# EAGLE board mini32 (EAGLE 7.2.0)
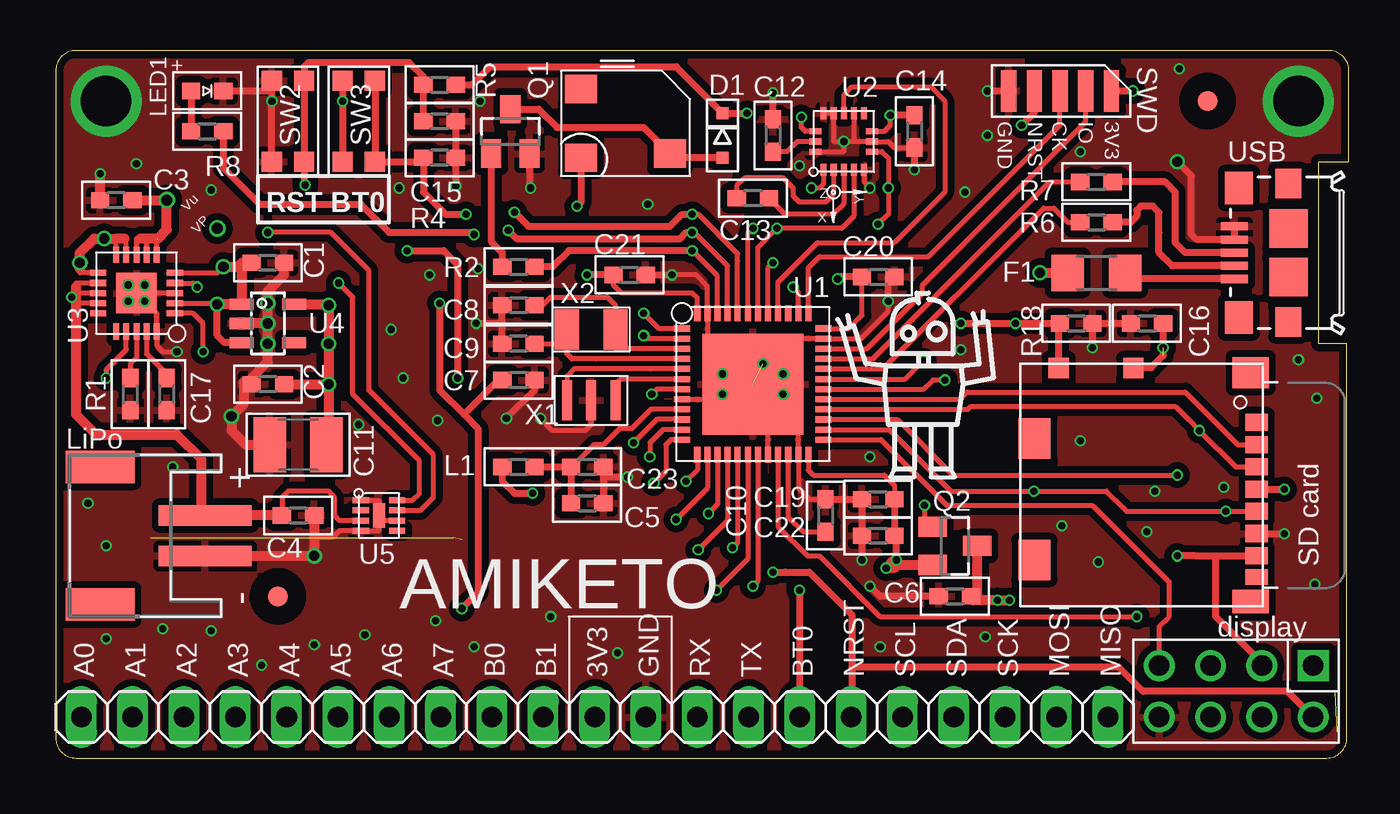
[diagram p0: board, top side]
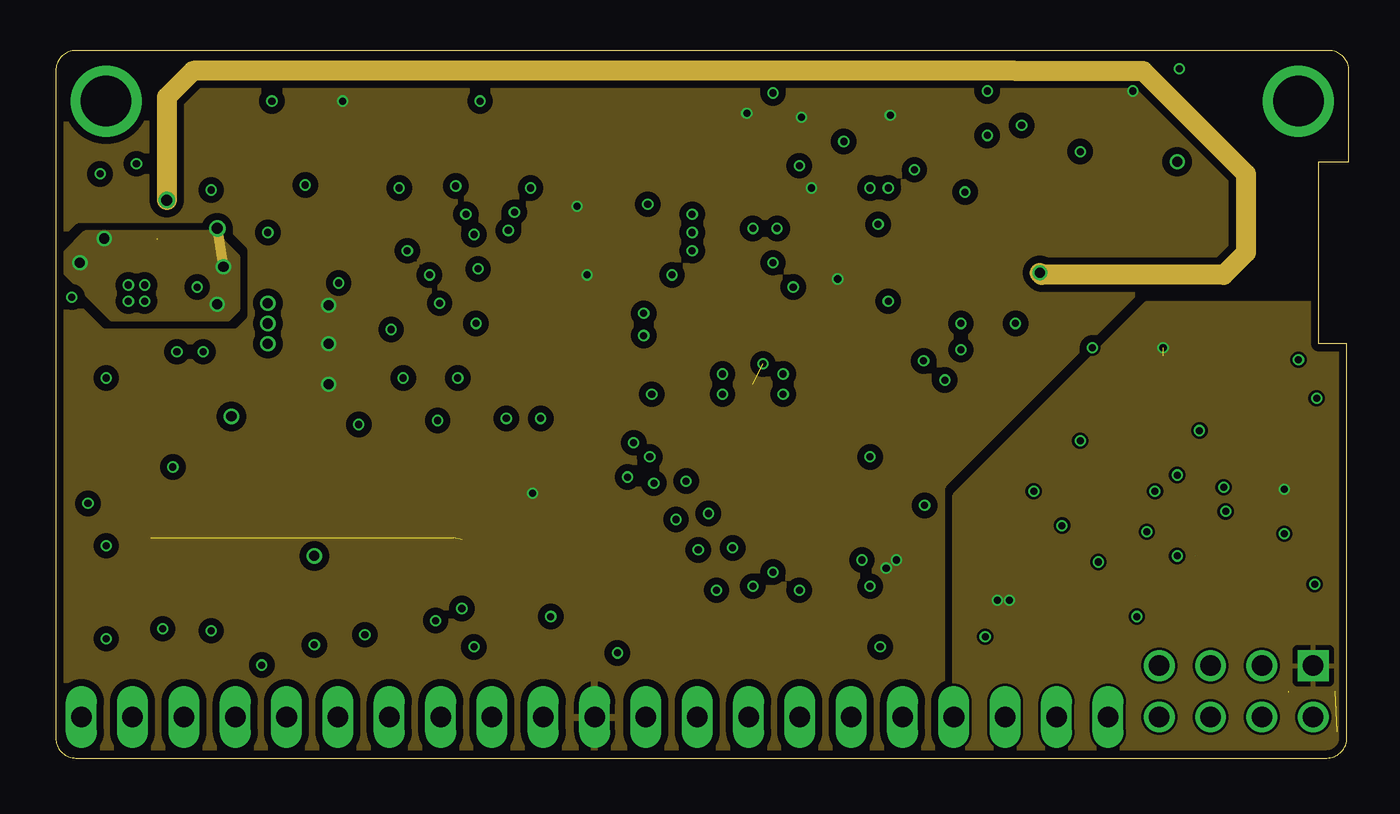
[diagram p1: board, inner layer V]
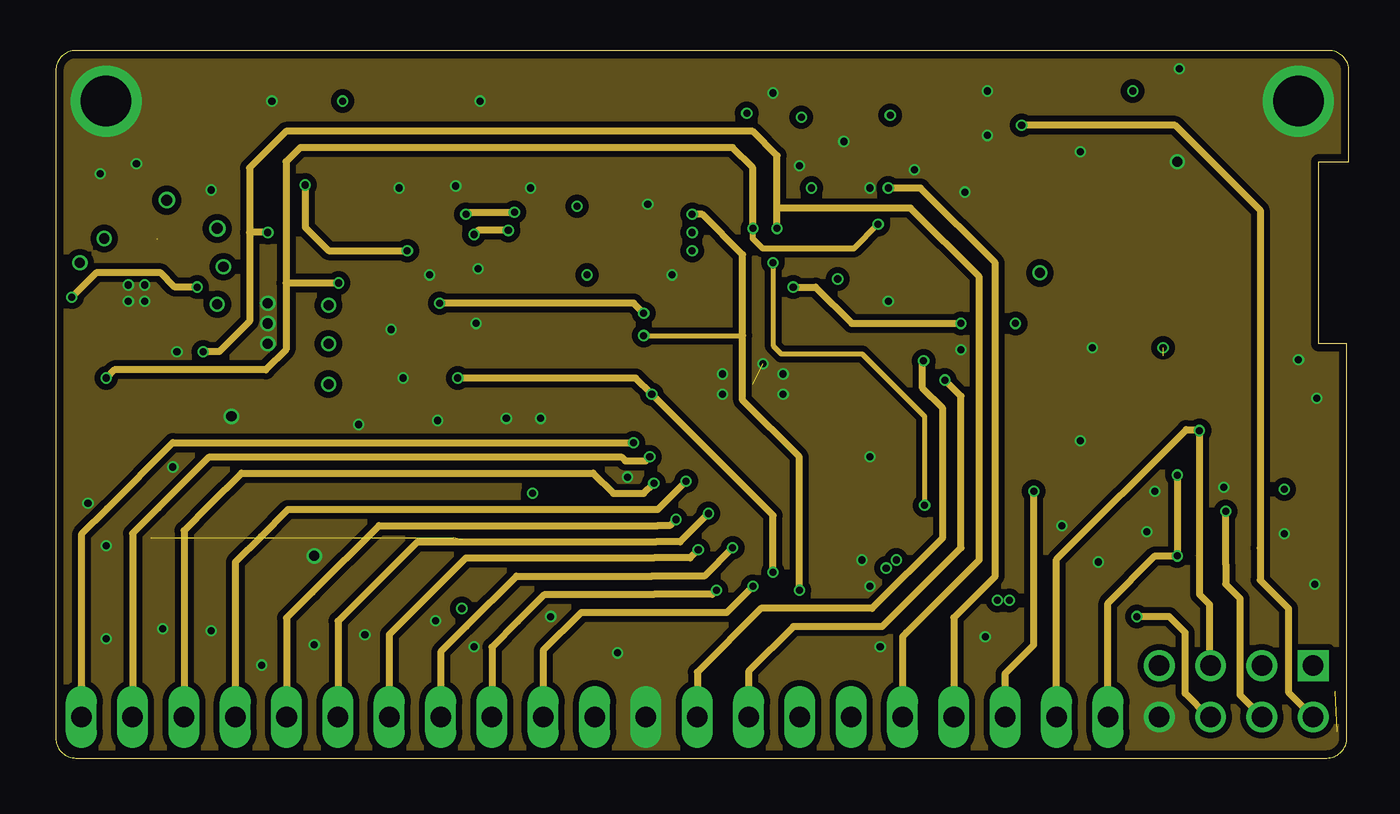
[diagram p2: board, inner layer Signal]
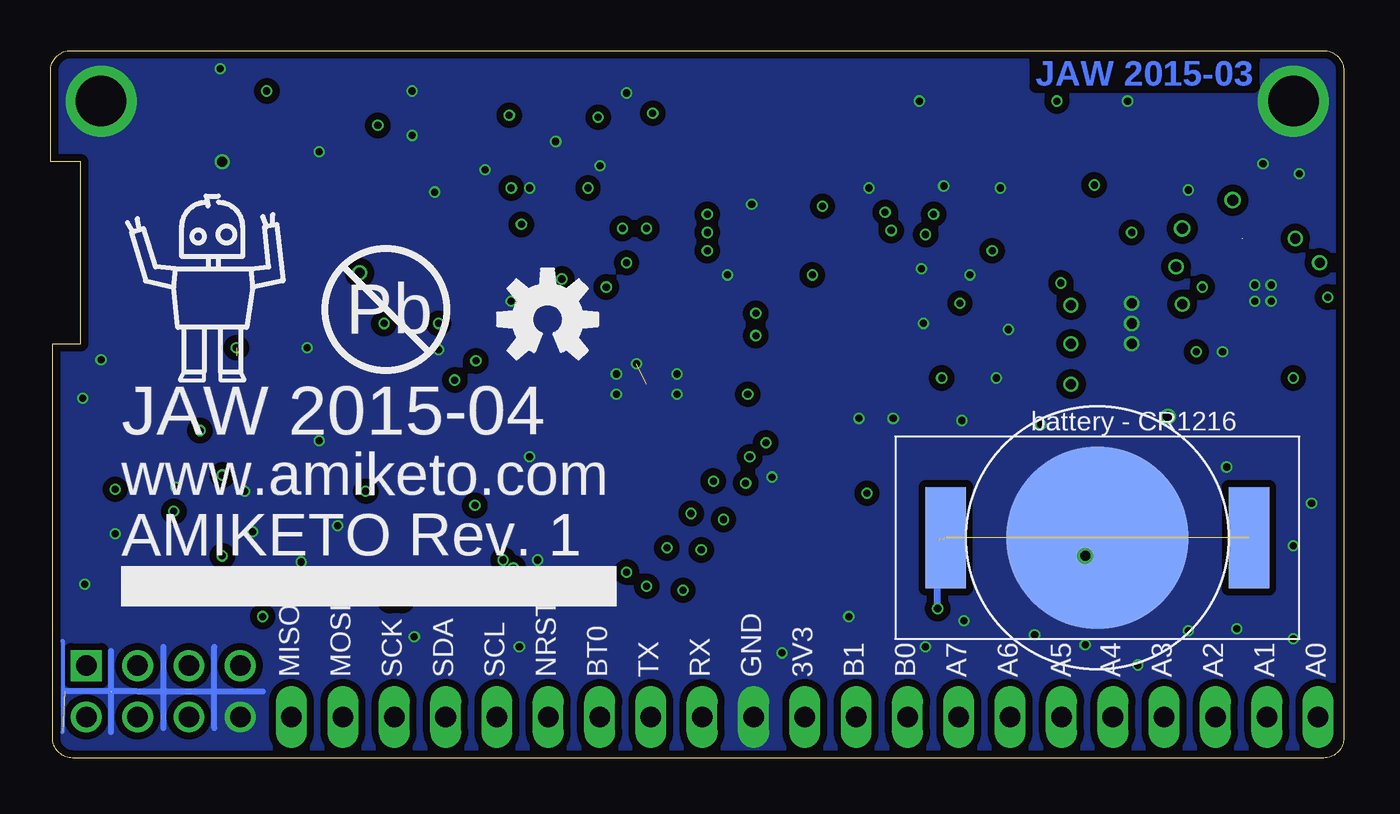
[diagram p3: board, bottom side, seen from below]

Size 64 x 35 mm. Coordinates in mm from the lower left corner, seen from the top.
Outline: 64,29.5 64,34 arc90 63,35 1,35 arc90 0,34 0,1 arc90 1,0 62.9,0 arc90 63.9,1 63.9,20.5 62.5,20.5 62.5,29.5 64,29.5
Copper layers (1*2*15*16): Top 0.035559375mm / dielectric 0.17018125mm / V 0.01778125mm / dielectric 47mil / Signal 0.01778125mm / dielectric 0.17018125mm / Bottom 0.035559375mm
Design rules "OSHPark-4layer *": minimum track width 5mil, minimum drill 10mil, track to track 5mil, track to pad 5mil, pad to pad 5mil, via to via 5mil, smd to smd 5mil, copper to edge 15mil, drill to drill 6mil, minimum pad ring 4mil, minimum via ring 4mil, stop-mask expansion 4mil, vias tented up to drill 0.52mm, thermal gap 10mil
tKeepout: area -0.4,29.6 to 5.4,35.4; area 58.6,29.6 to 64.4,35.4

## Footprints (pad centres in the part's own frame; a part is rotated, then mirrored left to right if it is on the bottom)
CR1216 = smd 9 x 9: MINUS 0,0 | smd 2 x 5: PLUS1 -7.5,0; PLUS2 7.5,0
SMD0603 = smd 0.9 x 0.8: 1 -0.8,0; 2 0.8,0
SMD1210 = smd 1.6 x 2.7: 1 -1.4,0; 2 1.4,0
MICROSD/MOLEX/FRONT/PLAIN = smd 0.85 x 1.1: 1 3.105,-4.43; 2 2.005,-4.43; 3 0.905,-4.43; 4 -0.195,-4.43; 5 -1.295,-4.43; 6 -2.395,-4.43; 7 -3.495,-4.43 | smd 0.75 x 1.1: 8 -4.545,-4.43 | smd 1.17 x 1.8: P$1 -5.755,-4.13 | smd 1.55 x 1.8: P$2 5.565,-4.13 | smd 2 x 1.6: P$3 -3.7,6.57; P$4 2.3,6.57 | smd 1 x 1: SW1 5.8,1.67; SW2 5.8,5.37
JST-PH-2-SMT-RA = smd 1 x 4.6: 1 1,-3.7; 2 -1,-3.7 | smd 1.6 x 3.4: NC1 -3.4,1.5; NC2 3.4,1.5
HEADER-2X04 = drill 1.016 square: 1 -3.81,-1.27 | drill 1.016: 2 -3.81,1.27; 3 -1.27,-1.27; 4 -1.27,1.27; 5 1.27,-1.27; 6 1.27,1.27; 7 3.81,-1.27; 8 3.81,1.27
SOD-323 = smd 0.6 x 0.6: A 1.1,0; C -1.1,0
R1206 = smd 1.6 x 1.803: 1 -1.422,0; 2 1.422,0
M127-5X1 = smd 0.762 x 2.032: P$1 -2.54,0; P$2 -1.27,0; P$3 0,0; P$4 1.27,0; P$5 2.54,0
HEADER-21X1-PTH = drill 1.016 long: 1 -25.4,0; 2 -22.86,0; 3 -20.32,0; 4 -17.78,0; 5 -15.24,0; 6 -12.7,0; 7 -10.16,0; 8 -7.62,0; 9 -5.08,0; 10 -2.54,0; 11 0,0; 12 2.54,0; 13 5.08,0; 14 7.62,0; 15 10.16,0; 16 12.7,0; 17 15.24,0; 18 17.78,0; 19 20.32,0; 20 22.86,0; 21 25.4,0
SMD0603D = smd 0.9 x 0.8: A -0.8,0; C 0.8,0
PUI-0540 = smd 1.4 x 1.6: NC 1.8,2.2; P1 -1.6,2.2; P2 -1.4,-2.2
SOT-23 = smd 1 x 1.4: 1 -0.95,-1.1; 2 0.95,-1.1; 3 0,1.1
KMR211 = smd 1 x 1: 1 -2,0.8; 2 -2,-0.8; 3 2,0.8; 4 2,-0.8
UQPFN48 = smd 0.3 x 0.8: P1 -2.75,-3.5; P2 -2.25,-3.5; P3 -1.75,-3.5; P4 -1.25,-3.5; P5 -0.75,-3.5; P6 -0.25,-3.5; P7 0.25,-3.5; P8 0.75,-3.5; P9 1.25,-3.5; P10 1.75,-3.5; P11 2.25,-3.5; P12 2.75,-3.5; P25 2.75,3.5; P26 2.25,3.5; P27 1.75,3.5; P28 1.25,3.5; P29 0.75,3.5; P30 0.25,3.5; P31 -0.25,3.5; P32 -0.75,3.5; P33 -1.25,3.5; P34 -1.75,3.5; P35 -2.25,3.5; P36 -2.75,3.5 | smd 0.8 x 0.3: P13 3.5,-2.75; P14 3.5,-2.25; P15 3.5,-1.75; P16 3.5,-1.25; P17 3.5,-0.75; P18 3.5,-0.25; P19 3.5,0.25; P20 3.5,0.75; P21 3.5,1.25; P22 3.5,1.75; P23 3.5,2.25; P24 3.5,2.75; P37 -3.5,2.75; P38 -3.5,2.25; P39 -3.5,1.75; P40 -3.5,1.25; P41 -3.5,0.75; P42 -3.5,0.25; P43 -3.5,-0.25; P44 -3.5,-0.75; P45 -3.5,-1.25; P46 -3.5,-1.75; P47 -3.5,-2.25; P48 -3.5,-2.75 | smd 5 x 5: PAD 0,0
LGA16A = smd 0.3 x 0.6: 1 -1,-1.4; 2 -0.5,-1.4; 3 0,-1.4; 4 0.5,-1.4; 5 1,-1.4; 9 1,1.4; 10 0.5,1.4; 11 0,1.4; 12 -0.5,1.4; 13 -1,1.4 | smd 0.6 x 0.3: 6 1.4,-0.5; 7 1.4,0; 8 1.4,0.5; 14 -1.4,0.5; 15 -1.4,0; 16 -1.4,-0.5
LGA20P = smd 0.3 x 0.8: 1 -1,-1.9; 2 -0.5,-1.9; 3 0,-1.9; 4 0.5,-1.9; 5 1,-1.9; 11 1,1.9; 12 0.5,1.9; 13 0,1.9; 14 -0.5,1.9; 15 -1,1.9 | smd 0.8 x 0.3: 6 1.9,-1; 7 1.9,-0.5; 8 1.9,0; 9 1.9,0.5; 10 1.9,1; 16 -1.9,1; 17 -1.9,0.5; 18 -1.9,0; 19 -1.9,-0.5; 20 -1.9,-1 | smd 2 x 2: PAD 0,0
SOT-23-5 = smd 0.55 x 1.2: 1 -0.95,-1.3; 2 0,-1.3; 3 0.95,-1.3; 4 0.95,1.3; 5 -0.95,1.3
TDFN8EP = smd 0.3 x 0.8: 1 -0.75,-0.9; 2 -0.25,-0.9; 3 0.25,-0.9; 4 0.75,-0.9; 5 0.75,0.9; 6 0.25,0.9; 7 -0.25,0.9; 8 -0.75,0.9 | smd 1.2 x 0.6: PAD 0,0
FIDUCIAL_1MM = smd 1 x 1: 1 0,0
CONN_USB_MICRO-B = smd 1.6 x 1.4: BODY@1 -3.2,2.45; BODY@2 3.2,2.45 | smd 1.45 x 1.3: BODY@3 3.425,0; BODY@6 -3.425,0 | smd 1.9 x 1.9: BODY@4 1.2,0; BODY@5 -1.2,0 | smd 0.4 x 1.35: P1 -1.3,2.675; P2 -0.65,2.675; P3 0,2.675; P4 0.65,2.675; P5 1.3,2.675
RESONATOR-CSTCE = smd 0.5 x 2: 1 -1.2,0; 2 0,0; 3 1.2,0
XTAL-32X15 = smd 1.2 x 2: P$1 -1.2,0; P$2 1.2,0

## Placement (x,y rotation side)
B1  BATTERY-CR2016  [CR1216]  12.2,10.9 0 bottom
C1  10u  [SMD0603]  10.5,24.5 0 top
C2  1u  [SMD0603]  10.5,18.5 180 top
C3  10u  [SMD0603]  3,27.6 180 top
C4  4u7  [SMD0603]  12,12 0 top
C5  10u  [SMD0603]  26.3,12.6 0 top
C6  1u  [SMD0603]  44.5,8 180 top
C7  1u  [SMD0603]  22.9,18.7 180 top
C8  5p  [SMD0603]  22.9,22.4 180 top
C9  5p  [SMD0603]  22.9,20.5 180 top
C10  4u7  [SMD0603]  38.1,12 90 top
C11  100u  [SMD1210]  12,15.5 180 top
C12  4.7u  [SMD0603]  35.5,30.8 90 top
C13  .22u  [SMD0603]  34.5,27.7 0 top
C14  .1u  [SMD0603]  42.5,31 270 top
C15  .1u  [SMD0603]  19,31.5 0 top
C16  4.7u  [SMD0603]  54,21.5 180 top
C17  10n  [SMD0603]  5.5,18 90 top
C19  .1u  [SMD0603]  40.7,12.8 180 top
C20  .1u  [SMD0603]  40.7,23.8 0 top
C21  .1u  [SMD0603]  28.4,23.9 0 top
C22  4.7u  [SMD0603]  40.7,11 180 top
C23  .1u  [SMD0603]  26.3,14.4 0 top
CN1  MICROSDPLAIN  [MICROSD/MOLEX/FRONT/PLAIN]  55,13.5 90 top
CN3  [JST-PH-2-SMT-RA]  3.7,11 90 top
CN6  [HEADER-2X04]  58.42,3.3 180 top
D1  DIODESOD-323  [SOD-323]  33,30.8 270 top
F1  [R1206]  51.5,24 180 top
J1  HEADER-5X1  [M127-5X1]  49.7,33 180 top
JP1  HEADER-21X1  [HEADER-21X1-PTH]  26.67,2.03 0 top
L1  10u  [SMD0603]  22.9,14.4 0 top
LED1  white  [SMD0603D]  7.5,33 0 top
LOGO1  OSHW-LOGOM  [OSHW-LOGO-M]  39.4,21.7 0 bottom
NOISY1  PUI-5040  [PUI-0540]  28.2,31.3 90 top
Q1  IRLML6344TRPBF  [SOT-23]  22.5,31 0 top
Q2  DMP2035U-7  [SOT-23]  44.5,10.5 270 top
R1  10k  [SMD0603]  3.7,18 270 top
R2  100  [SMD0603]  22.9,24.3 180 top
R4  10k  [SMD0603]  19,29.7 180 top
R5  10k  [SMD0603]  19,33.3 0 top
R6  22  [SMD0603]  51.5,26.5 180 top
R7  22  [SMD0603]  51.5,28.5 180 top
R8  470  [SMD0603]  7.5,31 180 top
R18  100k  [SMD0603]  50.5,21.5 0 top
SW2  SWITCHKMR211  [KMR211]  11.5,31.5 90 top
SW3  SWITCHKMR211  [KMR211]  15,31.5 90 top
U1  STM32F411/48  [UQPFN48]  34.5,18.5 270 top
U2  LSM303D  [LGA16A]  39,30.5 0 top
U3  ADP5062  [LGA20P]  4,23 90 top
U4  MCP1824  [SOT-23-5]  10.5,21.5 270 top
U5  MAX17048  [TDFN8EP]  16,12 270 top
U$1  ROBOTMAN-LOGO2  [ROBOTMAN-LOGO2]  42.9,18.3 0 top
U$2  FIDUCIAL  [FIDUCIAL_1MM]  57,32.5 0 top
U$3  FIDUCIAL  [FIDUCIAL_1MM]  11,8 0 top
U$4  ROBOTMAN-LOGO2  [ROBOTMAN-LOGO2]  56,23.1 0 bottom
USB1  CON-USB-F-MICRO-B  [CONN_USB_MICRO-B]  61,25 90 top
X1  12MHz  [RESONATOR-CSTCE]  26.5,17.7 0 top
X2  32k768  [XTAL-32X15]  26.5,21.2 180 top

## Library data of the parts
B1 C1-C17 C19-C23 CN1 CN6 D1 J1 JP1 L1 LED1 NOISY1 Q1 Q2 R1 R2 R4-R8 R18 SW2 SW3 U1-U5 U$1 U$4 X1 X2 = jaw
CN3 F1 U$2 U$3 = adafruit
LOGO1 = Sparkfun-Aesthetics
USB1 = dp_devices

## Nets
BATSTAT: U3.16
BOOT0: JP1.15 R4.2 SW3.2 SW3.4 U1.P2 U1.P44
DPYCS: CN6.7 U1.P25
DPYDC: CN6.6 U1.P21
GND: B1.MINUS C1.2 C2.2 C3.2 C4.2 C5.2 C6.2 C7.1 C8.2 C9.2 C10.2 C11.2 C12.2 C14.2 C15.2 C16.2 C17.1 C19.2 C20.2 C21.2 C22.2 C23.2 CN1.6 CN3.2 CN6.8 J1.P$5 JP1.12 LED1.C Q1.2 R1.2 R4.1 R18.2 SW2.1 SW2.3 U1.P8 U1.P20 U1.P23 U1.P35 U1.P47 U1.PAD U2.5 U2.7 U2.10 U2.12 U2.13 U2.16 U3.3 U3.20 U3.PAD U4.2 U5.1 U5.4 U5.6 U5.PAD USB1.P4 USB1.P5 X1.2
I2CCL: JP1.17 U1.P42 U2.4 U3.1 U5.7
I2CDA: JP1.18 U1.P43 U2.6 U3.17 U5.8
IMUINT: U1.P40 U2.11
IOA0: JP1.1 U1.P10
IOA1: JP1.2 U1.P11
IOA2: JP1.3 U1.P12
IOA3: JP1.4 U1.P13
IOA4: JP1.5 U1.P14
IOA5: JP1.6 U1.P15
IOA6: JP1.7 U1.P16
IOA7: JP1.8 U1.P17
IOB0: JP1.9 U1.P18
IOB1: JP1.10 U1.P19
IOB8: R8.1 U1.P45
IOB9: R2.1 U1.P46
IOCARD: CN1.SW2 R18.1 U1.P38
N$1: C12.1 U2.15
N$2: C13.2 U2.3
N$3: F1.1 USB1.P1
N$4: C13.1 U2.2
N$5: C17.2 U3.19
N$6: R1.1 U3.18
N$7: R6.1 USB1.P2
N$8: R7.1 USB1.P3
N$9: Q1.1 R2.2
N$11: LED1.A R8.2
N$12: U1.P5 X1.1
N$13: U1.P6 X1.3
N$14: D1.A NOISY1.P2 Q1.3
N$15: C8.1 U1.P3 X2.P$1
N$16: C9.1 U1.P4 X2.P$2
N$18: C10.1 U1.P22
N$21: B1.PLUS1 B1.PLUS2 C7.2 U1.P1
N$22: U5.5
NPWREN: Q2.1 U1.P41
NRST: C15.1 CN6.2 J1.P$4 JP1.16 R5.1 SW2.2 SW2.4 U1.P7
RX: JP1.13 U1.P31
SDCS: CN1.2 U1.P29
SPIMISO: CN1.7 CN6.3 JP1.21 U1.P27
SPIMOSI: CN1.3 CN6.5 JP1.20 U1.P28
SPISCK: CN1.5 CN6.4 JP1.19 U1.P26
SWDCK: J1.P$3 U1.P37
SWDIO: J1.P$2 U1.P34
SWDWO: U1.P39
TX: JP1.14 U1.P30
USBDM: R6.2 U1.P32
USBDP: R7.2 U1.P33
VBAT: C4.1 CN3.1 U3.4 U3.12 U3.13 U3.14 U5.3
VCC: C2.1 C11.1 C14.1 C19.1 C20.1 C21.1 C22.1 D1.C J1.P$1 JP1.11 L1.1 NOISY1.P1 Q2.2 R5.2 SW3.1 SW3.3 U1.P24 U1.P36 U1.P48 U2.1 U2.8 U2.14 U4.5
VCCA: C5.1 C23.1 L1.2 U1.P9
VCCE: C6.1 C16.1 CN1.4 CN1.SW1 CN6.1 Q2.3
VP: C1.1 U3.2 U3.5 U3.9 U3.10 U3.11 U4.1 U4.3
VUSB: C3.1 F1.2 U3.6 U3.7 U3.8

## Tracks (layer width: path | path; a pad name or v marks a point on that pad's centre or on a via)
BOOT0  (via drill 0.35)
  Top 0.25: U1.P44 33.75,24.6 33.75,24.95 31.8,26.9 v31.5,26.9 | U1.P2 29.25,20.75 v29.1,20.9
  Top 0.35: SW3.4 SW3.2 18,29.5 R4.2 18.2,28 19.3,26.9 v20.3,26.9 | v22.7,27 23.4,26.3 30.4,26.3 31,26.9 v31.5,26.9 | JP1.15 36.83,8.27 v36.8,8.3
  Signal 0.25: v29.1,20.9 33.9,20.9 34,20.9
  Signal 0.35: v20.3,26.9 20.4,27 v22.7,27 | v36.8,8.3 36.8,14.9 34,17.7 34,20.9 34,24.9 32,26.9 v31.5,26.9
DPYCS
  Top 0.25: U1.P25 40.85,15.75 44.1,12.5 51.3,12.5 55.1,8.7 55.1,7 54.61,6.51 CN6.7
DPYDC  (via drill 0.35)
  Top 0.25: U1.P21 35.75,11.45 37.2,10 37.8,10 40.8,7 v53.5,7
  Signal 0.35: CN6.6 57.07,2.03 55.9,3.2 55.9,6.2 55.1,7 v53.5,7
GND  (via drill 0.35, 0.5, 2.5)  (2 unrouted)
  Top 0.25: U1.P8 32.75,17.75 v33,18 | 41.2,23.8 C20.2 | v30.5,23.9 31.7,23.9 32.25,23.35 U1.P47 32.25,20.75 33,20 v33,19 | v41.2,22.6 41.2,22.1 39.85,20.75 39.55,20.75 U1.P35 36.75,20.75 v35,19.5 | C10.2 37.3,12.8 36.75,13.35 U1.P23 36.75,16.15 36.5,16.2 35.9,16.2 | U1.P20 35.25,16.15 35.5,16.2 35.9,16.2 | U3.3 4.5,23 v4.4,22.6 5,22 U3.20 5,20.4 5.3,20.1 v6,20.1 | X1.2 26.5,16.5 26.2,16.2 24.6,16.2 v24,16.8 | U2.16 39,30 v39,30.5 | 39.5,30.5 U2.7 41.2,30.5 41.5,30.2 C14.2 | 39.5,30.5 v39,30.5 | v39,30.5 38.5,30.5 U2.12 U2.13 | U2.10 39.5,30.5 | U2.5 40,28.5 v40.3,28.2 | 12.8,10.9 13.7,10.9 14.05,11.25 U5.4 16,11.25 U5.PAD | U5.1 16,12.75 U5.PAD | U5.6 16.25,11.75 U5.PAD | v36,18 36,16.2 35.9,16.2
  Top 0.35: C9.2 22.1,21.5 | 22.1,21.5 C8.2 | SW2.3 10.7,33 | 10.7,33 v10.7,32.5 SW2.1 | C15.2 R4.1 19.8,28.5 v19.8,28.3 | Q1.2 23.45,28.25 v23.5,28.2 | LED1.C 10.7,33 | USB1.P5 USB1.P4 56.45,25.65 56.2,25.9 56.2,28.8 v55.5,29.5 | v20.8,21.5 22.1,21.5 | C23.2 27.1,13.9 | 27.1,13.9 C5.2 | v28.3,13.9 27.1,13.9 | C21.2 v30.5,23.9 | v41.2,22.6 41.2,23.8 C20.2 | C10.2 C19.2 C22.2 v39.9,9.8 | C16.2 R18.2 v51.3,20.3 | 46.06,33.04 v46.1,33 J1.P$5 | C12.2 v35.5,32.9 | C14.2 v42.5,29.1 | CN1.6 v60.8,11.1 | C6.2 40.8,8 v40.3,8.5 | C7.1 23.7,18.2 v22.3,16.8
  Top 0.5: CN3.2 9.9,10 10.6,10 v12.8,10 12.8,10.7 12.8,10.9 C4.2 | C3.2 v2.2,28.9 | v10.5,21.5 U4.2 | v10.5,21.5 10.5,23.1 11.3,23.9 C1.2 | C11.2 9.4,15.5 8.7,16.2 v8.7,16.9 9.3,17.5 9.3,18.6 | C2.2 9.4,18.5 9.3,18.6 | 9.3,18.6 9.5,18.6 10.5,19.6 v10.5,21.5
  Bottom 0.2: 63.4,5.8 63.4,1.3
  Bottom 0.3: 53.5,3.3 59.7,3.3 63.3,3.3 | 55.9,1.5 55.9,5.5 | 58.4,1.5 58.4,5.5 | 61,1.3 61,5.3
  other vias: 2.5,32.5 61.5,32.5 46.1,30.8 36.8,29.3 24.5,7 20.7,5.5 18.8,6.8 2.5,10.5 10.2,4.6 7.7,6.3 17.2,18.8 7.7,28.1 20.9,24.2 17,28.2 18.5,23.9 16.6,21.2 18.9,16.7 4,29.4 21,32.5 36,19 29.3,27.4 40.3,14.9 12.8,5.6 1.6,12.6 2.5,5.9 5.3,6.4 5.8,14.4 50.7,30 44.8,20.2 45,28 15,16.5 15.3,6.1 27.8,5.2 54.4,13.2 55.6,34.1 40.8,5.5 51.6,9.7 46,6 50.7,15.7 62.4,17.8 62.3,8.6 57.8,13.4 61.5,19.7 49.8,11.5 54,11.2 3.6,22.6 3.6,23.4 4.4,23.4 10.5,22.5 10.5,20.5
  pour Bottom (isolate 0.35, no thermals): -0.5,35.5 -0.5,0 66.7,0 66.7,35.5
  pour Top (isolate 0.35): 0,35.5 0,0 66.7,0 66.7,35.5
  pour Signal (isolate 0.3, no thermals): 0,35.5 0,0 66.7,0 66.7,35.5
I2CCL  (via drill 0.35)
  Top 0.25: U1.P42 34.75,25.25 v35.7,26.2 38.9,26.2 39.5,26.8 U2.4 | v7.3,20.1 7.3,21.5 6.8,22 U3.1 | U5.7 18.05,12.25 18.7,12.9 18.7,15 15.5,18.2 15.5,24.1 13.6,26 v10.5,26
  Signal 0.35: v35.7,26.2 35.7,27.2 | 35.7,27.2 35.7,29.8 34.5,31 11.4,31 9.6,29.2 9.6,26 | 9.6,26 9.6,21.6 8.1,20.1 v7.3,20.1 | 35.7,27.2 37.4,27.2 42.3,27.2 45.7,23.8 45.7,9.8 42.1,6.2 41.91,6.01 JP1.17 | v10.5,26 9.6,26
I2CDA  (via drill 0.35)
  Top 0.25: U1.P43 34.25,25.95 v34.5,26.2 | U3.17 3.5,20.2 3.1,19.8 2.5,19.2 v2.5,18.8 | U2.6 40.9,30 41.2,29.7 v41.2,28.2 41.2,26.9 v40.7,26.4 | U5.8 17.65,12.75 18,13.1 18,14.7 14.7,18 14.7,22.8 v14,23.5
  Signal 0.3: v40.7,26.4 39.5,25.2 35,25.2 34.5,25.7 v34.5,26.2
  Signal 0.35: v41.2,28.2 42.8,28.2 46.5,24.5 46.5,9 44.45,6.95 JP1.18 | v34.5,26.2 34.5,29.2 33.5,30.2 12.1,30.2 11.4,29.5 11.4,23.5 | 11.4,23.5 11.4,20.2 10.4,19.2 2.9,19.2 v2.5,18.8 | v14,23.5 11.4,23.5
IMUINT
  Top 0.25: U1.P40 35.75,23.55 37.7,25.5 41.5,25.5 44,28 44,32.5 43.3,33.2 39.4,33.2 39,32.8 U2.11
IOA0  (via drill 0.35)
  Top 0.25: U1.P10 29.75,16.75 v28.6,15.6
  Signal 0.35: v28.6,15.6 5.8,15.6 2.54,12.34 1.27,11.07 JP1.1
IOA1  (via drill 0.35)
  Top 0.25: U1.P11 30.05,16.25 29.4,15.6 v29.4,14.9
  Signal 0.35: JP1.2 3.81,11.11 5.08,12.38 7.6,14.9 27.9,14.9 28,14.9 28.2,14.7 28.9,14.7 29.2,14.7 v29.4,14.9
IOA2  (via drill 0.35)
  Top 0.25: U1.P12 30.45,15.75 30.2,15.5 30.2,14.2 v29.6,13.6
  Signal 0.35: v29.6,13.6 29.1,13.1 27.6,13.1 26.6,14.1 9.2,14.1 7.62,12.52 6.35,11.25 JP1.3
IOA3  (via drill 0.35)
  Top 0.25: U1.P13 31.75,14.25 v31.2,13.7
  Signal 0.35: v31.2,13.7 29.8,12.3 11.5,12.3 10.16,10.96 8.89,9.69 JP1.4
IOA4  (via drill 0.35)
  Top 0.25: U1.P14 32.25,13.35 v30.7,11.8
  Signal 0.35: v30.7,11.8 30.4,11.5 29.8,11.5 16,11.5 12.7,8.2 11.43,6.93 JP1.5
IOA5  (via drill 0.35)
  Top 0.25: U1.P15 32.75,12.55 v32.3,12.1
  Signal 0.35: v32.3,12.1 30.9,10.7 29.7,10.7 17.9,10.7 15.24,8.04 13.97,6.77 JP1.6
IOA6  (via drill 0.35)
  Top 0.25: U1.P16 33.25,11.75 v31.8,10.3
  Signal 0.35: v31.8,10.3 31.4,9.9 29.6,9.9 20.3,9.9 17.78,7.38 16.51,6.11 JP1.7
IOA7  (via drill 0.35)
  Top 0.25: U1.P17 33.75,10.65 v33.5,10.4
  Signal 0.35: v33.5,10.4 32.1,9 29.5,9 22.8,9 20.32,6.52 19.05,5.25 JP1.8
IOB0  (via drill 0.35)
  Top 0.25: U1.P18 34.25,9.85 v32.7,8.3
  Signal 0.35: v32.7,8.3 32.5,8.1 29.6,8.1 24.2,8.1 22.86,6.76 21.59,5.49 JP1.9
IOB1  (via drill 0.35)
  Top 0.25: 34.55,8.55 v34.5,8.5 34.75,8.75 U1.P19
  Signal 0.35: v34.5,8.5 33.2,7.2 26,7.2 24.13,5.33 JP1.10
IOB8  (via drill 0.35)
  Top 0.25: U1.P45 33.25,24.35 31.6,26 v31.5,26
  Top 0.35: R8.1 8.3,29.2 10.1,27.4 15.1,27.4 16.5,26 17.5,26 20.6,26 v20.7,25.9 | v22.4,26.1 22.8,25.7 30.9,25.7 31.2,26 v31.5,26
  Signal 0.35: v22.4,26.1 20.9,26.1 v20.7,25.9
IOB9  (via drill 0.35)
  Top 0.25: U1.P46 32.75,23.85 31.8,24.8 v31.5,25.1
  Top 0.35: v31.5,25.1 25.4,25.1 24.6,24.3 R2.1
IOCARD  (via drill 0.35)
  Top 0.25: U1.P38 36.75,23.05 v36.5,23.3
  Top 0.35: v44.8,21.5 v47.5,21.5 R18.1 49.63,21.43 CN1.SW2
  Signal 0.35: v44.8,21.5 43.5,21.5 39.4,21.5 37.6,23.3 v36.5,23.3
N$1
  Top 0.25: U2.15 36.7,30.5 36.2,30 C12.1
N$2
  Top 0.25: U2.3 39,27.4 38.5,26.9 36.1,26.9 C13.2
N$3
  Top 0.35: USB1.P1 52.92,23.7 F1.1
N$4
  Top 0.25: U2.2 38.5,27.9 38.1,27.5 36.8,27.5 36.5,27.8 36.5,28.2 36,28.7 34.1,28.7 33.7,28.3 C13.1
N$5
  Top 0.25: U3.19 4.5,20 5.5,19 C17.2
N$6
  Top 0.25: U3.18 4,19.8 3.7,19.5 R1.1
N$7
  Top 0.35: USB1.P2 55.25,24.35 54.6,25 54.6,26 54.6,27 54.3,27.3 53.7,27.3 53.5,27.1 53.5,26.8 53.2,26.5 R6.1
N$8
  Top 0.35: USB1.P3 55.9,25 55.4,25.5 55.4,28 54.9,28.5 R7.1
N$9
  Top 0.35: Q1.1 21.55,25.55 22.1,25 R2.2
N$11
  Top 0.35: LED1.A R8.2
N$12
  Top 0.25: U1.P5 29.45,19.25 25.65,19.25 25.3,18.9 X1.1
N$13
  Top 0.25: U1.P6 29.55,18.75 29.35,18.75 27.95,18.75 27.7,18.5 X1.3
N$14
  Top 0.35: Q1.3 23.9,32.1 24.8,31.2 28.9,31.2 29.1,31.2 NOISY1.P2 30.6,29.7 D1.A
N$15
  Top 0.25: U1.P3 28.65,20.25 27.75,20.25 27.7,20.3 X2.P$1 27.7,22 27.7,22.4 27.3,22.8 26.9,22.8 24.5,22.8 24.1,22.4 C8.1
N$16
  Top 0.25: U1.P4 26.75,19.75 25.55,19.75 25.3,20 25.3,20.5 | C9.1 25.3,20.5 | 25.3,20.5 X2.P$2
N$18
  Top 0.25: U1.P22 36.25,11.95 37,11.2 C10.1
N$21  (via drill 0.35)  (2 unrouted)
  Top 0.25: U1.P1 29.85,21.25 v29.1,22
  Top 0.35: v19,22.5 19,18.2 20.2,17 | 20.2,17 20.9,16.3 20.9,8.2 v20.1,7.4 | C7.2 21.9,18.7 20.2,17
  Signal 0.35: v29.1,22 28.6,22.5 v19,22.5
  Bottom 0.35: v20.1,7.4 20.1,10.8
NPWREN  (via drill 0.35)
  Top 0.25: v43,12.5 43,11.35 Q2.1 | U1.P41 35.25,24.25 v35.5,24.5
  Signal 0.25: v43,12.5 43,16.9 39.9,20 35.9,20 35.5,20.4 v35.5,24.5
NRST  (via drill 0.35)  (1 unrouted)
  Top 0.25: U1.P7 29.75,18.25 v29.5,18
  Top 0.35: C15.1 R5.1 | R5.1 18.2,33.2 | R5.1 18.2,33.7 17.5,34.4 12.5,34.4 12.3,34.2 SW2.4 SW2.2 12.3,28.3 v12.35,28.35 | v17.4,25.1 19.2,25.1 19.9,24.4 v19.9,18.8 | J1.P$4 48.43,31.93 v47.8,31.3 | v35.5,9.2 36.1,9.2 37.3,9.2 39.4,7.1 39.4,5.4 39.4,4.5 | 39.4,4.5 39.4,2.06 JP1.16 | 61,3.26 CN6.2 | 61,3.3 53.8,3.3 52.6,4.5 40,4.5 39.4,4.5
  Signal 0.35: v19.9,18.8 28.7,18.8 v29.5,18 35.5,12 v35.5,9.2 | v12.35,28.35 12.35,26.25 13.5,25.1 v17.4,25.1 | v47.8,31.3 55.4,31.3 59.6,27.1 59.6,10.4 59.6,8.8 61,7.4 61,3.26 CN6.2
RX  (via drill 0.35)
  Top 0.25: U1.P31 42.05,18.75 42.85,19.55 v42.95,19.65 43,19.7
  Top 0.35: v42.95,19.65 42.85,19.55
  Signal 0.35: v42.95,19.65 42.9,19.6 42.9,18.3 43.9,17.3 43.9,10.9 40.4,7.4 34.9,7.4 31.75,4.25 JP1.13
SDCS
  Top 0.25: U1.P29 44.75,17.75 45.1,18.1 55.9,18.1 58.49,15.51 CN1.2
SPIMISO  (via drill 0.35)  (1 unrouted)
  Top 0.25: U1.P27 41.65,16.75 44.4,14 v55.5,14
  Top 0.35: 56.4,10.01 57.4,10.01 | 57.4,10.01 CN1.7 | 56.4,10 v55.5,10 | CN6.3 59.69,4.71 57.4,7 57.4,10.01
  Signal 0.35: v55.5,14 v55.5,10 54.4,10 52.07,7.67 JP1.21
SPIMOSI  (via drill 0.35)
  Top 0.25: U1.P28 45.15,17.25 45.3,17.4 55.4,17.4 56.05,16.75 v56.6,16.2 58.4,14.4 CN1.3
  Signal 0.35: JP1.20 49.53,9.83 55.95,16.25 56.65,16.25 v56.6,16.2 56.6,8.1 57.1,7.6 57.1,4.62 CN6.5
SPISCK  (via drill 0.35)
  Top 0.25: U1.P26 41.25,16.25 44.3,13.2 v48.4,13.2 52,13.2 52.8,12.4 52.99,12.21 59,12.21 v57.9,12.21 CN1.5
  Signal 0.35: v57.9,12.21 57.9,9.6 57.9,8.6 58.6,7.9 58.6,3.12 CN6.4 | JP1.19 46.99,4.19 48.4,5.6 v48.4,13.2
SWDCK
  Top 0.25: U1.P37 37.25,24.25 37.8,24.8 43.2,24.8 49.7,31.3 J1.P$3
SWDIO
  Top 0.25: U1.P34 40.15,20.25 42.9,23 42.9,23.4 50.97,31.47 J1.P$2
TX  (via drill 0.35)
  Top 0.25: U1.P30 42.95,18.25 43.4,18.7 v44,18.7
  Signal 0.35: v44,18.7 44.8,17.9 44.8,10.4 40.9,6.5 36.5,6.5 34.29,4.29 JP1.14
USBDM
  Top 0.25: U1.P32 40.95,19.25 48.2,26.5 48.9,27.2 49.4,27.2 50.1,26.5 R6.2
USBDP
  Top 0.25: U1.P33 40.45,19.75 49.2,28.5 R7.2
VBAT  (via drill 0.35)
  Top 0.25: U3.12 1,23.5 1,23.3 | U3.13 1,23 | U3.14 1,22.5 | U3.4 6.8,23.5 v7,23.3 | U5.3 14.05,11.75 13.8,12 13.8,12.9 13.5,13.2 11.5,13.2 11.2,12.9 C4.1
  Top 0.35: v0.8,22.8 1,22.8
  Top 0.5: C4.1 CN3.1 7,12 | 6,12.2 6.2,12 7,12 | 7,12 7.2,12.2 7.2,14.8 6,16 2,16 1,17 1,22.5 1,22.8 | 1,22.8 1,23 | 1,23.3 1,22.8
  Signal 0.35: v7,23.3 5.9,23.3 5.2,24 2,24 v0.8,22.8
VCC  (via drill 0.35, 0.5)
  Top 0.25: U1.P48 31.75,22.75 31.5,23 28,23 27.6,23.4 C21.1 | U1.P36 39.25,21.25 39.9,21.9 C20.1 | U1.P24 37.25,14.25 37.5,14 41,14 41.5,13.5 C19.1 | U2.1 38,28.4 37.8,28.2 v37.4,28.2 | U2.14 37.1,31 36.9,31.2 v36.9,31.7 | U2.8 41,31 41.3,31.3 v41.3,31.8
  Top 0.35: SW3.3 v14.2,32.5 SW3.1 | 26,30.2 NOISY1.P1 26,27.5 v25.8,27.3 | v34.2,31.9 D1.C 30.7,34.2 21.5,34.2 20.6,33.3 R5.2 | C21.1 v26.3,23.9 | C20.1 38.8,23.8 v38.7,23.7 | C19.1 41.5,11.9 C22.1 arc-90 41.6,10.9 v41.6,9.8 | J1.P$1 v53.3,33 | L1.1 22.1,13.7 22.7,13.1 v23.6,13.1 | C14.1 41.4,31.8 v41.3,31.8
  Top 0.5: 12.9,16 C11.1 | 13.5,15.6 C11.1 | v13.5,18.5 13.5,15.6 | 13.5,15.6 C11.1 | C2.1 v13.5,18.5 | U4.5 13.45,22.45 v13.5,22.4 v13.5,18.5 | v41.6,9.8 41.5,9.8 v41.1,9.4 41.5,9.4 41.7,9.6 41.75,9.55 Q2.2
  other vias: 13.5,20.5
  pour V (isolate 0.35, rank 3): -0.5,35.5 -0.5,0 66.7,0 66.7,35.5
VCCA
  Top 0.25: U1.P9 29.45,17.25 28.5,16.3 27.9,16.3 27.1,15.5 26.65,15.5 25.55,14.4 C23.1
  Top 0.35: L1.2 C23.1 C5.1
VCCE  (via drill 0.35)  (1 unrouted)
  Top 0.35: C16.1 54.8,19.9 54.2,19.3 CN1.SW1 | CN1.4 v60.8,13.3
  Top 0.5: CN1.4 | Q2.3 45.6,8.8 45.6,8.4 45.6,8 45.8,7.8 | v47.2,7.8 v46.6,7.8 45.8,7.8 | 45.8,7.8 45.4,7.8 C6.1
  other vias: 54.8,20.3
  pour V: 54,22.5 64.5,22.5 64.5,-0.5 44.5,-0.5 44.5,13
VP  (via drill 0.5, 0.55)
  Top 0.25: U3.11 1.2,24 1.2,24.2 | U3.9 3.5,25.7 3.4,25.7 | U3.10 3,25.7 | U3.5 8,24 v8.3,24.3 | U3.2 8.2,22.5 v8,22.45
  Top 0.35: U4.3 8.35,20.55 8,20.9 v8,22.45
  Top 0.5: C1.1 9.2,24.5 | 9.2,24.5 U4.1 9.2,24.5 | 3.4,25.7 3,25.7 v2.4,25.7 1.9,25.7 1.2,25 v1.2,24.5 1.2,24.2 | v8.3,24.3 9,24.3 9.2,24.5 | 9.3,22.45 v8,22.45
  V 0.5: v8,26.2 v8.3,24.3
  pour V (isolate 0.35, rank 2): 1.5,26 7.8,26 9,24.8 9,22.2 8.5,21.7 2.8,21.7 0.5,24 0.5,25
VUSB  (via drill 0.5, 0.55)  (1 unrouted)
  Top 0.25: U3.6 5,25.7 | U3.7 4.5,25.7 | U3.8 4,25.7 4.2,25.7
  Top 0.5: C3.1 v5.5,27.6 5.5,26.15 5.05,25.7 | v48.7,24 F1.2 | 5,25.7 4.5,25.7 4.2,25.7
  V 1: v5.5,27.6 5.5,32.7 6.8,34 47.5,34 53.8,34 58.9,28.9 58.9,25 57.8,23.9 48.8,23.9 v48.7,24

## Text on the board
Bottom: JAW 2015-03
tPlace: + | SWD | GND | NRST | CK | IO | 3V3 | USB | Z | Vu | RST | BT0 | Y | VP | X | LiPo | SD card | AMIKETO | display | A0 | A1 | A2 | A3 | A4 | A5 | A6 | A7 | B0 | B1 | 3V3 | GND | RX | TX | BT0 | NRST | SCL | SDA | SCK | MOSI | MISO
bPlace: Pb | battery - CR1216 | JAW 2015-04 | www.amiketo.com | AMIKETO Rev. 1 | A0 | A1 | A2 | A3 | A4 | A5 | A6 | A7 | B0 | B1 | 3V3 | GND | RX | TX | BT0 | NRST | SCL | SDA | SCK | MOSI | MISO
bStop: JAW 2015-03